# Altium PCB OnboardingPCB.PcbDoc
Units mm, origin at the board's own origin, x right, y up, seen from the top; angles counter-clockwise.
Board outline 29 x 19 mm, 2 copper layers (Top Layer, Bottom Layer); 10 components, 6 nets, 24 pads, 5 vias.
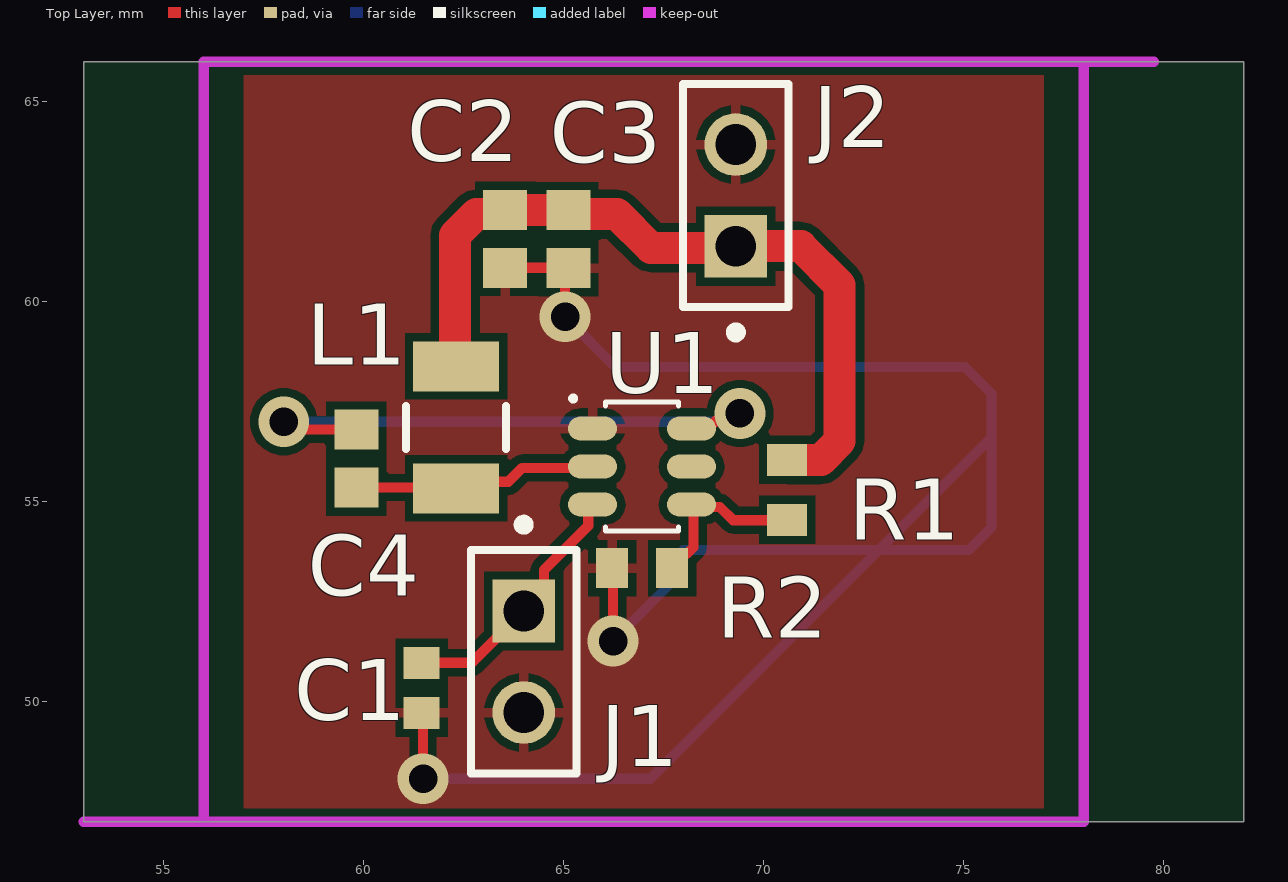
[diagram p0: Top Layer view]
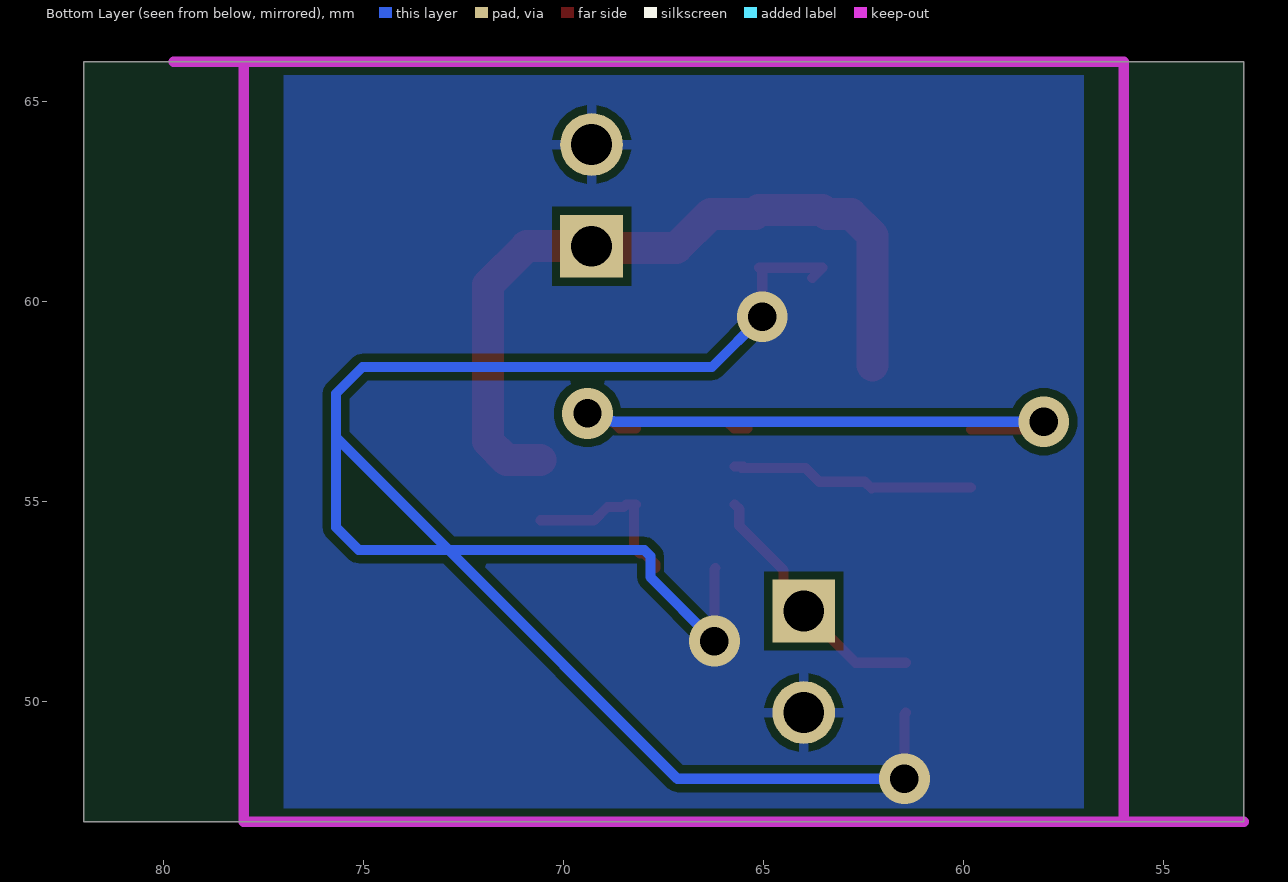
[diagram p1: Bottom Layer view, seen from below]
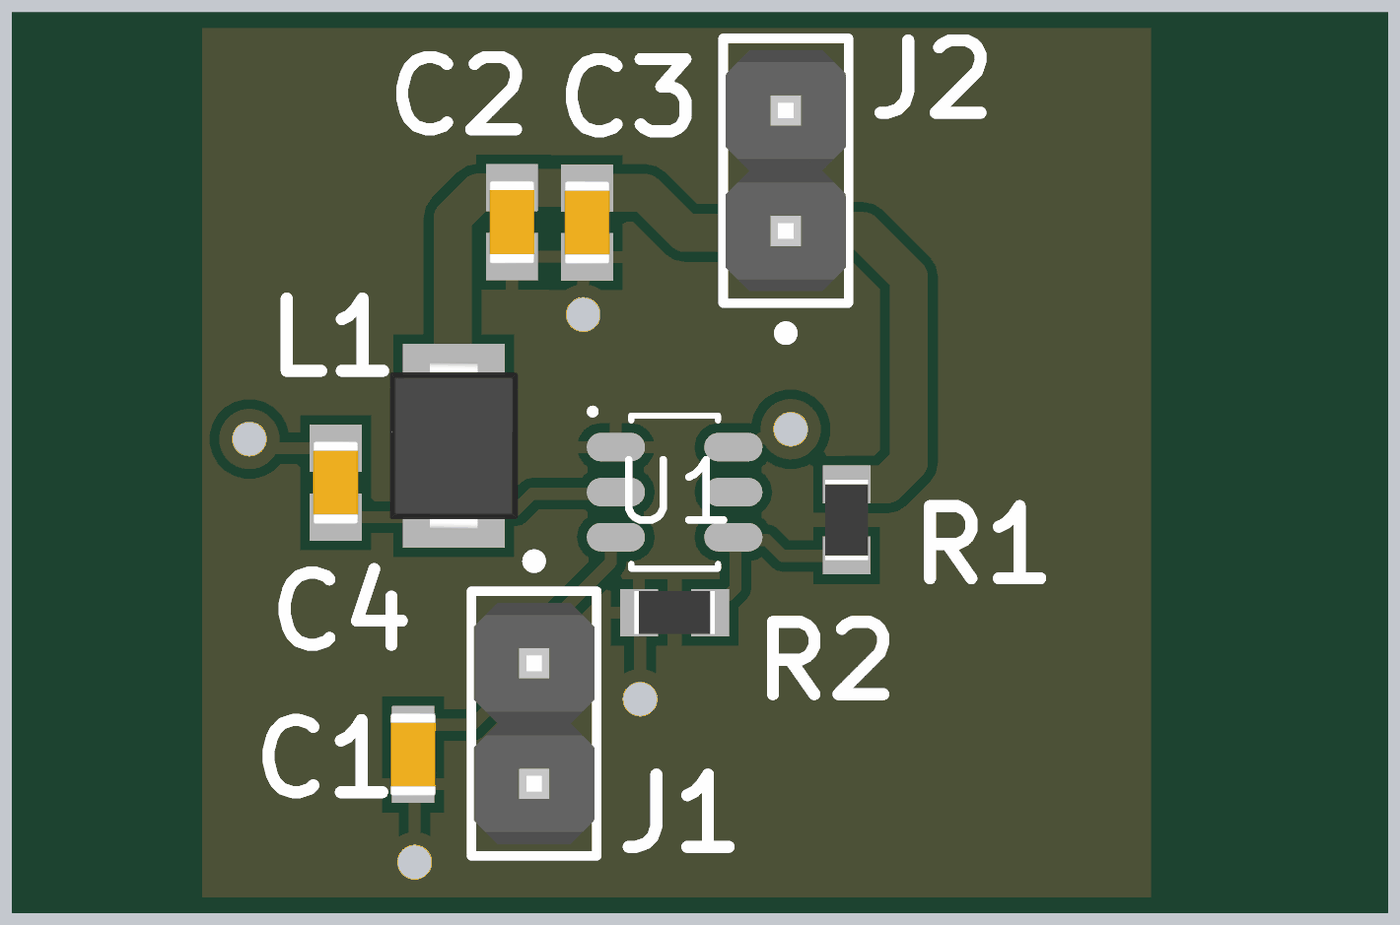
[diagram p2: 3D render of the assembled board from above, using the file's embedded part models]

## Layer stack, top to bottom
Top Solder: solder mask 0.0102, Solder Resist, Dk 3.5
Top Layer: signal copper 0.0356
Dielectric 1: dielectric 0.32, FR-4, Dk 4.8
Bottom Layer: signal copper 0.0356
Bottom Solder: solder mask 0.0102, Solder Resist, Dk 3.5

## Board outline
53,47 53,66 82,66 82,47

## Design rules (kind name [scope] priority, off if disabled: settings)
BoardOutlineClearance [All] p1: gap=0.2 ignorepadtopadclearanceinfootprint=FALSE except(0.4: Arc-SplitBarrior Arc-SplitContinuation Track-SplitBarrior Track-SplitContinuation SMDPad-SplitBarrior SMDPad-SplitContinuation THPad-SplitBarrior THPad-SplitContinuation Via-SplitBarrior Via-SplitContinuation Fill-SplitBarrior Fill-SplitContinuation Poly-SplitBarrior Poly-SplitContinuation Region-SplitBarrior Region-SplitContinuation Text-SplitBarrior Text-SplitContinuation)
Clearance [All] p1: gap=0.1 ignorepadtopadclearanceinfootprint=FALSE except(0.15: Arc-Text Track-Text SMDPad-Text THPad-Text Via-Text Fill-Text Poly-Text Region-Text Text-Text; 0.2: Arc-Poly Arc-Hole Track-Poly Track-Hole SMDPad-Poly SMDPad-Hole THPad-Poly THPad-Hole Via-Poly Via-Hole Fill-Poly Fill-Hole Poly-Poly Poly-Hole Region-Hole Text-Hole)
ComponentClearance [All] p1: gap=0.25 collisioncheckmode=3 verticalgap=0.25 showdistances=TRUE donotcheckwithout3dbody=TRUE
DiffPairsRouting [All] p1: maxlimit=0.203 minlimit=0.203 mostfreqgap=0.203 toplayer_minwidth=0.145 toplayer_maxwidth=0.145 toplayer_prefwidth=0.145 bottomlayer_minwidth=0.145 bottomlayer_maxwidth=0.145 bottomlayer_prefwidth=0.145 maxuncoupledlength=12.7
HoleSize [All] p1: absolutevalues=TRUE maxlimit=6.3 minlimit=0.2 maxpercent=80.000 minpercent=20.000
MinimumAnnularRing MinimumAnnularRingPad [Not(IsVia)] p1: minimumring=0.25
MinimumAnnularRing MinimumAnnularRingVia [IsVia] p2: minimumring=0.1
MinimumSolderMaskSliver [All] p1: minsoldermaskwidth=0.026
PasteMaskExpansion [All] p1: expansion=0 percent=-30.000000
PolygonConnect PolygonConnect_1 [All] p1: thpad.connectstyle=Relief thpad.reliefconductorwidth=0.25 thpad.reliefentries=4 thpad.polygonreliefangle="90 Angle" thpad.airgapwidth=0.2 smdpad.connectstyle=Relief smdpad.reliefconductorwidth=0.25 smdpad.reliefentries=4 smdpad.polygonreliefangle="90 Angle" smdpad.airgapwidth=0.2 via.connectstyle=Direct via.reliefconductorwidth=0.508 via.reliefentries=4 via.polygonreliefangle="90 Angle" via.airgapwidth=0.254
RoutingCorners [All] p1: cornerstyle=Round minsetback=2.54 maxsetback=2.54
RoutingVias [All] p1: holewidth=0.3 width=0.5 viastyle="Through Hole" minholewidth=0.3 minwidth=0.5 maxholewidth=6.3 maxwidth=10
SilkToSilkClearance [All] p1: silktosilkclearance=0.1
SilkToSolderMaskClearance [IsPad] p1: minsilkscreentomaskgap=0.15 clearancetoexposedcopper=TRUE
SolderMaskExpansion SolderMaskExpansion_1 [IsVia] p1: expansion=0.102 istentingtop=TRUE
SolderMaskExpansion [All] p2: expansion=0 istentingtop=FALSE
SupplyNets "Schematic Supply Nets_1" [InNet('GND')] p1: voltage=0.000
SupplyNets "Schematic Supply Nets" [InNet('3V5')] p2: voltage=0.000
Width [All] p1: maxlimit=10 minlimit=0.1 preferedwidth=0.15
22 further rules are at their usual default settings.

## Components (designator, comment, footprint, x,y, rotation, side; value= is the part's Value field where it differs from the comment)
C1 "Capacitor 1uF +/- 10% 16V 0603" CAPC1608X90X35LL15T15 61.449,50.348 r270 top value=10µF
C2 "Capacitor 1uF +/- 10% 16V 0603" CAPC1608X90X35ML15T15 63.532,61.573 r270 top value=15µF
C3 "Capacitor 1uF +/- 10% 16V 0603" CAPC1608X90X35ML15T15 65.118,61.566 r270 top value=15µF
C4 "Capacitor 1uF +/- 10% 16V 0603" CAPC1608X90X35ML15T15 59.819,56.08 r270 top value=0.1µF
J1 "M20-9990246" FP-M20-9990246-MFG 64,51 r270 top
J2 "M20-9990246" FP-M20-9990246-MFG 69.303,62.658 r90 top
L1 "CM322522-100KL" BOUR-CM322522_V 62.307,56.857 r90 top
R1 "Resistor 10k +/-1% 0603 100 mW" RESC1608X55X25ML10T15 70.584,55.294 r90 top value=56.2k
R2 "Resistor 10k +/-1% 0603 100 mW" RESC1608X55X25ML10T15 66.96,53.34 r180 top value=10k
U1 "AP62300TWU-7" SOT95P280X100-6N 66.96,55.88 r0 top

## Footprints (in the part's own frame and the unit in brackets; to place one, negate y for a bottom-side part, rotate by r counter-clockwise, add the part's x,y. Pads: shape width x height; smd on the part's side, far side on the other; paste and mask are expansions set on the pad)
BOUR-CM322522_V [mm] "Inductor, 2-Leads, Body 3.2x2.5mm, Pitch 3.05mm"
  rect 1.25x2.15 smd: 1(-1.525,0) 2(1.525,0)
  silkscreen extent -0.54,-1.25 0.54,1.25, body extent -1.77,-1.35 1.77,1.35, height 2.4
CAPC1608X90X35LL15T15 [mm] "Chip Capacitor, 2-Leads, Body 1.75x0.95mm, IPC High Density"
  rect 0.8x0.9 smd: 1(-0.625,0) 2(0.625,0)
  body extent -0.87,-0.48 0.87,0.48, height 0.9
CAPC1608X90X35ML15T15 [mm] "Chip Capacitor, 2-Leads, Body 1.75x0.95mm, IPC Low Density"
  rect 1x1.1 smd: 1(-0.725,0) 2(0.725,0)
  body extent -0.87,-0.48 0.87,0.48, height 0.9
FP-M20-9990246-MFG [mm]
  rect 1.57x1.57 hole 1.02 paste-2539.97 mask+0: 1(-1.27,0)
  round 1.57 hole 1.02 paste-2539.97 mask+0: 2(1.27,0)
  silkscreen extent -3.55,-1.32 2.79,1.32, body extent -2.89,-1.42 2.89,1.42, height 0.25
RESC1608X55X25ML10T15 [mm] "Chip Resistor, 2-Leads, Body 1.70x0.90mm, IPC Low Density"
  rect 0.8x1 smd: 1(-0.75,0) 2(0.75,0)
  body extent -0.85,-0.45 0.85,0.45, height 0.55
SOT95P280X100-6N [mm] "SOT23, 6-Leads, Body 2.90x2.80mm, Pitch 0.95mm, IPC Medium Density"
  oval 1.225x0.6 smd: 1(-1.238,0.95) 2(-1.238,0) 3(-1.238,-0.95) 4(1.237,-0.95) 5(1.237,0) 6(1.237,0.95)
  silkscreen extent -1.79,-1.61 0.91,1.76, body extent -0.8,-1.45 0.8,1.45, height 1

## Part data
C1 C2 C3 C4: library part CMP-001-00004-6, "Chip Capacitor, 1 uF, +/- 10%, 16 V, 0603 (1608 Metric)", Capacitor Type=Ceramic, Case/Package=0603, Max Operating Temperature=125°C, Min Operating Temperature=-55°C, Tolerance=10%, Voltage Rating=25V, Mounting Technology=SM, Pins=2, RoHS Compliant=True
J1 J2: library part CMP-15831-000009-1, "CONN HEADER VERT 2POS 2.54MM", Current Rating=3A, Manufacturer=Harwin, Temperature="-40°C to +105°C", Temperature Range High=+105°C, Temperature Range Low=-40°C, Automotive=No, Category=Conn, ComponentLink2Description=Datasheet, ComponentLink2URL=https://cdn.harwin.com/pdfs/M20-999.pdf, Conn Gender=Male, Conn Orientation=Vertical, Contact Material=Tin,Nickel, Device Class L1=Connectors, Device Class L2="Headers and Wire Housings", Device Class L3=unset, Digikey Description="CONN HEADER VERT 2POS 2.54MM", Height=8.99mm, Lead Free=Yes, Manufacturer Part Number=M20-9990246, Mouser Description="2.54mm (0.1\") Pitch SIL Vertical PC Tail Pin Header, 6.1mm mating pin height, tin, 2 contacts", Number of Contacts=2, Number of Rows=1, Octopart=https://octopart.com/m20-9990246-harwin-2590635, Package=M20-9990246, Pitch=2.54mm, RoHS=TRUE
L1: library part CMP-006-00005-3, "Chip Inductor, 10 uH, +/- 10%, -40 to 125 degC, 1210 (3225 Metric), RoHS, Tape and Reel", Case/Package=1210, Inductance=15µH, Inductance Tolerance=10%, Manufacturer=Bourns, Max Operating Temperature=100°C, Min Operating Temperature=-20°C, Package Description="2-Pin Surface Mount Device, Body 3.2 x 2.5 mm", Package Quantity=1, Resistance=2.1Ohm, Self Resonant Frequency=30MHz, Core Material=Ferrite, Datasheet URL=http://www.murata.com/~/media/webrenewal/support/library/catalog/products/emc/emifil/c30e.ashx?la=en-gb, Datasheet Version=Aug-14, Mounting Technology=SM, Package Reference=1210, Packaging=TapeandReel, Pins=2, Q Factor=30, RoHS Compliant=True, Shielding=Unshielded, Tolerance=10%
R1: library part CMP-009-00017-5, "Chip Resistor, 56.2 KOhm, +/- 1%, 01 W, -55 to 155 degC, 0603 (1608 Metric)", Case/Package=0603, Max Operating Temperature=155°C, Min Operating Temperature=-55°C, Power=100mW, Tolerance=1%, Voltage Rating=50V, Mounting Technology=SM, Pins=2, RoHS Compliant=True
R2: library part CMP-009-00017-5, "Chip Resistor, 10 KOhm, +/- 1%, 01 W, -55 to 155 degC, 0603 (1608 Metric)", Case/Package=0603, Max Operating Temperature=155°C, Min Operating Temperature=-55°C, Power=100mW, Tolerance=1%, Voltage Rating=50V, Mounting Technology=SM, Pins=2, RoHS Compliant=True
U1: library part CMP-031-00006-1, "DC-DC Switching Synchronous Buck Regulator, Adjustable, 4.2V-18Vin, 0.8V-7V/3A out, TSOT-26-6", Case/Package=VSSOP, Max Operating Temperature=85°C, Max Supply Voltage=18V, Min Operating Temperature=-40°C

## Via types
v1: diameter 1.27, hole 0.711, Top Layer to Bottom Layer, tented both sides, 5 vias

## Nets (pads, with @x,y where several pads share a name; then routed paths per layer and width w, separated by ;. In a path a pad name is that pad's centre, name@x,y a point inside that pad or via, vN(x,y) a via of type N, cw(c..) or ccw(c..) an arc to the next point about the centre after c; other vN are vias at no path point)
GND: C1.2 C2.2 C3.2 J1.2 J2.2 R2.2 U1.1 | length 50.7
  Top Layer w0.254: C1.2 61.483,49.69 v1(61.483,48.076) ; C2.2@63.787,60.594 C2.2 65.111,60.848 C3.2 65.036,60.759 v1(65.036,59.625) ; U1.1@65.413,56.83 U1.1 65.742,56.83 U1.1@65.902,56.99 ; R2.2 66.233,53.317 v1(66.233,51.516)
  Bottom Layer w0.254: v1(61.483,48.076) 67.16,48.076 72.875,53.791 ; v1(65.036,59.625) 66.291,58.37 75.032,58.37 75.695,57.707 75.695,56.612 ; v1(66.233,51.516) 67.834,53.117 67.834,53.642 67.983,53.791 72.875,53.791 ; 72.875,53.791 75.128,53.791 75.695,54.358 75.695,56.612 ; 72.875,53.791 75.695,56.612
NetC4_1: C4.1 U1.6 | length 14.8
  Top Layer w0.254: v1(58,57) 58.275,57 58.47,56.805 C4.1 ; U1.6 68.604,56.83 68.786,57.012 69.212,57.012 v1(69.406,57.207)
  Bottom Layer w0.254: v1(58,57) 68.749,57 68.762,57.012 69.212,57.012 v1(69.406,57.207)
NetC4_2: C4.2 L1.1 U1.2 | length 6.2
  Top Layer w0.254: C4.2 L1.1@62.311,55.355 ; L1.1 62.475,55.5 63.615,55.5 63.962,55.847 U1.2@65.55,55.847 ; U1.2@65.504,55.88 U1.2
NetR1_1: R1.1 R2.1 U1.4 | length 4.4
  Top Layer w0.254: R2.1 67.71,53.44 67.983,53.713 68.096,53.713 68.245,53.862 68.245,54.883 U1.4 68.437,54.93 68.497,54.87 68.905,54.87 69.239,54.535 R1.1@70.576,54.535
VBAT: C1.1 J1.1 U1.3 | length 7.2
  Top Layer w0.254: C1.1 62.703,50.973 J1.1 ; U1.3 65.613,54.821 65.613,54.398 64.503,53.287 J1.1@64.503,52.773 ; J1.1 J1.1@64.503,52.773 ; J1.1 J1.1@64.503,52.773
VOUT: C2.1 C3.1 J2.1 L1.2 R1.2 | length 19.3
  Top Layer w0.8: L1.2@62.284,58.406 62.284,61.659 62.823,62.198 63.432,62.198 C2.1 63.536,62.295 C3.1@65.114,62.295 ; C3.1 65.218,62.191 66.334,62.191 67.178,61.347 J2.1@69.262,61.347 ; J2.1 70.926,61.388 71.898,60.417 71.898,56.512 71.429,56.044 R1.2
pads on no net: U1.5

## Polygon pours and split planes (outlines as drawn)
GND on Top Layer "`" (solid, pour order 1): 57,47.071 57,66.071 77,66.071 77,47.071
GND on Bottom Layer "GND_L02_P003" (solid, pour order 3): 77,66 77,47 57,47 57,66

## Keep-outs
Keep-Out Layer:
  lines w0.254: 53,47 59,47 ; 73.75,66 78,66 78,47 56,47 56,66 67.25,66 79.75,66